# EAGLE board robopoly_shield (EAGLE 6.5.0)
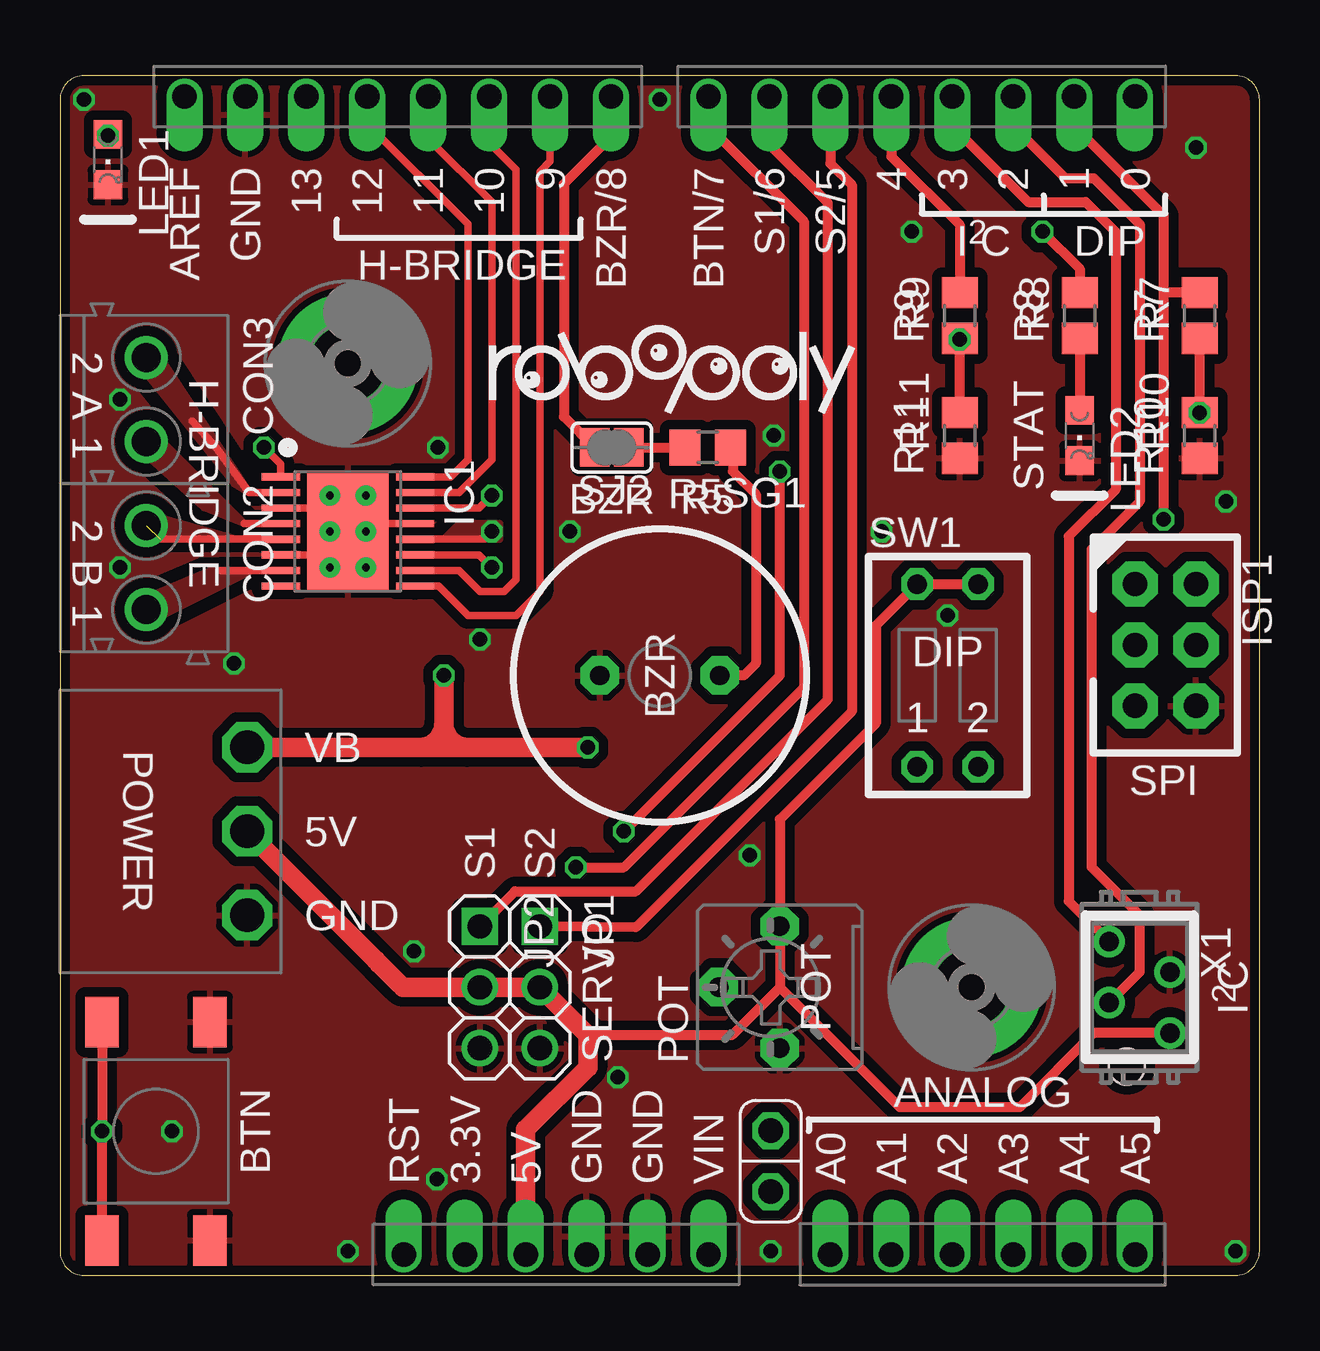
[diagram p0: board, top side]
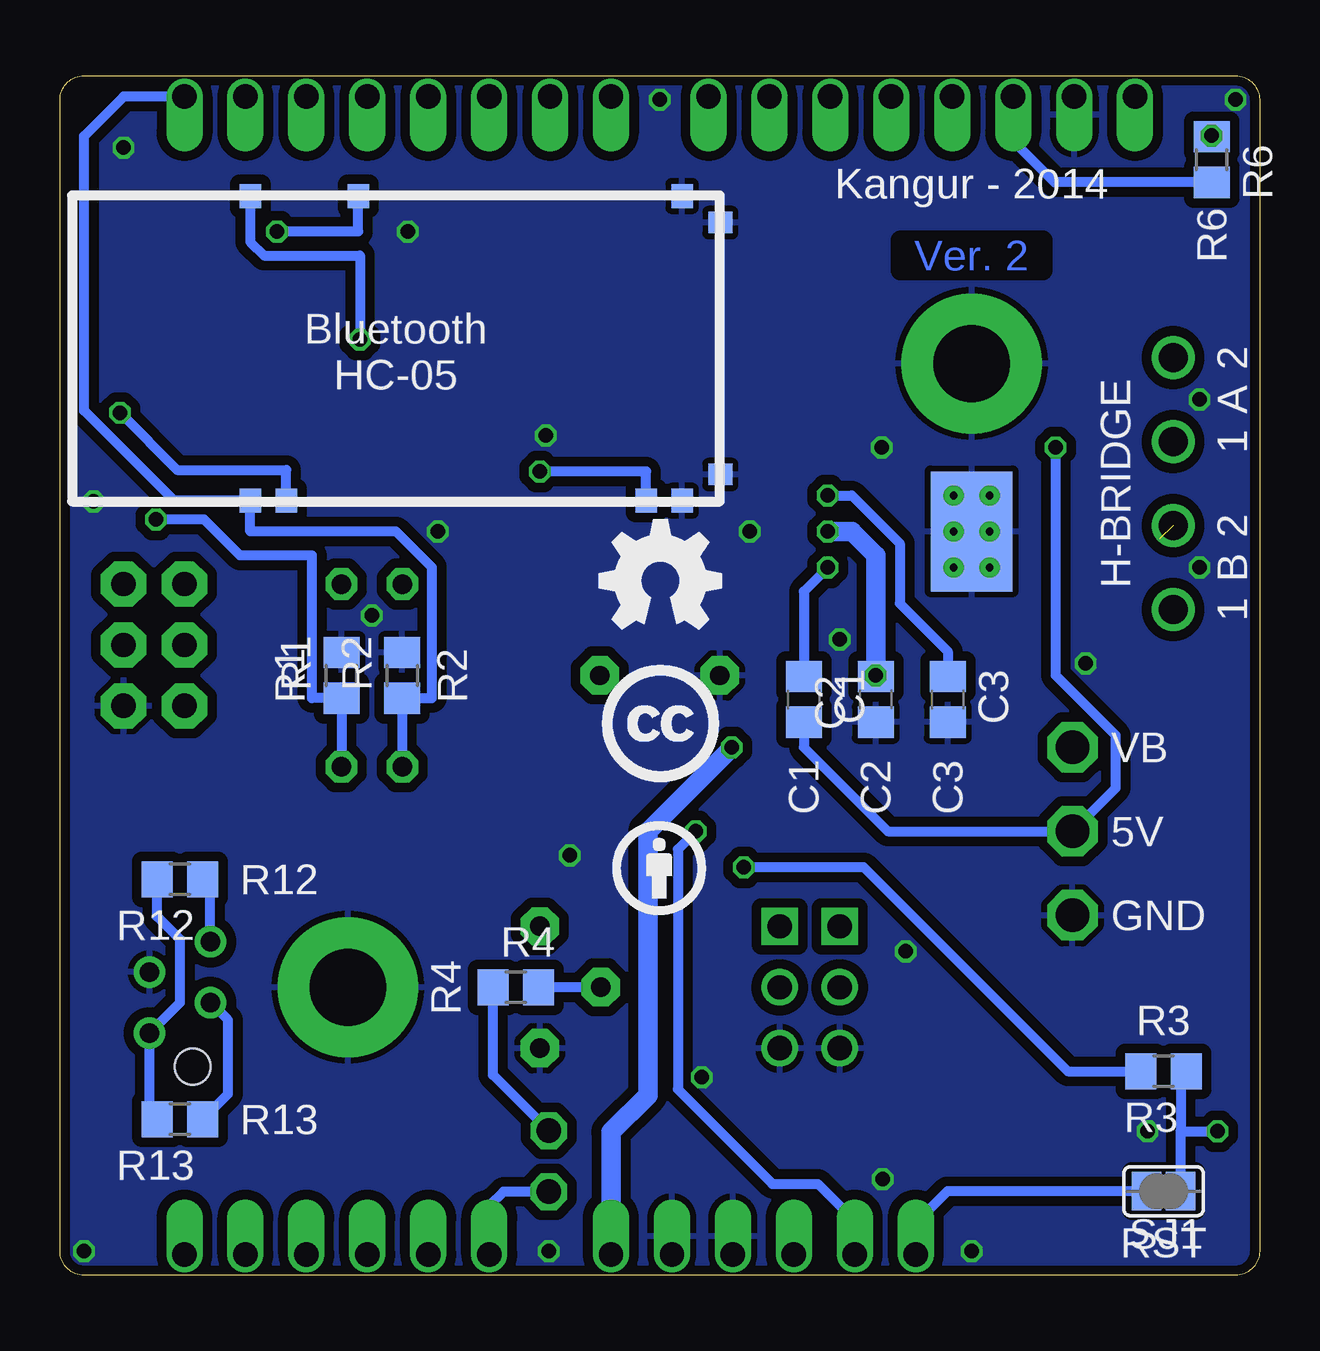
[diagram p1: board, bottom side, seen from below]

Size 50 x 50 mm. Coordinates in mm from the lower left corner, seen from the top.
Outline: 0,49 0,1 arc90 1,0 49,0 arc90 50,1 50,49 arc90 49,50 1,50 arc90 0,49
Copper layers (1*16): Top 0.035mm / dielectric 1.5mm / Bottom 0.035mm
Design rules "Fusion_eagle_rule_v1.1 *": minimum track width 6mil, minimum drill 12mil, track to track 6mil, track to pad 6mil, pad to pad 6mil, via to via 6mil, smd to smd 0mil, copper to edge 4mil, drill to drill 10mil, minimum pad ring 10mil, minimum via ring 6mil, stop-mask expansion 2mil, vias tented up to drill 100mil, thermal gap 10mil

## Footprints (pad centres in the part's own frame; a part is rotated, then mirrored left to right if it is on the bottom)
BUTTON = smd 1.4 x 2.1: 1 2.25,4.55; 2 2.25,-4.55; 3 -2.25,4.55; 4 -2.25,-4.55
C0805 = smd 1.3 x 1.5: 1 -0.95,0; 2 0.95,0
4UCON-19836 = drill 1.4 octagon: 1 -3.5,7.8; 2 0,7.8; 3 3.5,7.8
4UCON-19963 = drill 1.2: 1 -1.75,3.6; 2 1.75,3.6
3,2-PAD = drill 3.2 pad 5.842: B3,2 0,0
HTSSOP-16 = smd 0.3 x 1.6: 1 -2.275,-2.8; 2 -1.625,-2.8; 3 -0.975,-2.8; 4 -0.325,-2.8; 5 0.325,-2.8; 6 0.975,-2.8; 7 1.625,-2.8; 8 2.275,-2.8; 9 2.275,2.8; 10 1.625,2.8; 11 0.975,2.8; 12 0.325,2.8; 13 -0.325,2.8; 14 -0.975,2.8; 15 -1.625,2.8; 16 -2.275,2.8 | smd 5 x 3.4: PAD@1 0,0 | smd 5 x 3.4 bottom: PAD@2 0,0 | drill 0.33: PAD@3 -1.5,0.75; PAD@4 0,0.75; PAD@5 1.5,0.75; PAD@6 -1.5,-0.75; PAD@7 0,-0.75; PAD@8 1.5,-0.75
BLUETOOTH = smd 1 x 0.9: 1 -6.4,9.5; 2 -6.4,8; 12 -6.4,-7; 13 -6.4,-8.5; 22 6.3,-8.5; 31 6.3,5; 34 6.3,9.5 | smd 0.9 x 1: 14 -5.3,-10.1; 21 5.2,-10.1
2X3-NOSILK-STACK = drill 1.016 pad 1.88 octagon: 1 -2.54,-1.27; 2 -2.54,1.27; 3 0,-1.27; 4 0,1.27; 5 2.54,-1.27; 6 2.54,1.27
1X03 = drill 1.016 square: 1 -2.54,0 | drill 1.016: 2 0,0; 3 2.54,0
JUMPER = drill 1.02 octagon: A -1.27,0; B 1.27,0
CHIPLED_0805 = smd 1.2 x 1.2: A 0,-1.05; C 0,1.05
ARDUINO-LONG = drill 1.016 offset: 1 -10.668,-24.13; 2 -8.128,-24.13; 3 -5.588,-24.13; 4 -3.048,-24.13; 5 -0.508,-24.13; 6 2.032,-24.13; 7 7.112,-24.13; 8 9.652,-24.13; 9 12.192,-24.13; 10 14.732,-24.13; 11 17.272,-24.13; 12 19.812,-24.13; 13 19.812,24.13; 14 17.272,24.13; 15 14.732,24.13; 16 12.192,24.13; 17 9.652,24.13; 18 7.112,24.13; 19 4.572,24.13; 20 2.032,24.13; 21 -2.032,24.13; 22 -4.572,24.13; 23 -7.112,24.13; 24 -9.652,24.13; 25 -12.192,24.13; 26 -14.732,24.13; 27 -17.272,24.13; 28 -19.812,24.13
B25P = drill 0.813 pad 1.6 octagon: A -2.54,0; E 2.54,0; S 0,2.54
R0805 = smd 1.3 x 1.5: 1 -0.95,0; 2 0.95,0
PS1240P02BT = drill 0.8 pad 1.6 octagon: P$1 -2.5,0; P$2 2.5,0
SJ = smd 1.219 x 1.6: 1 -0.711,0; 2 0.711,0
EDG-02 = drill 0.813 octagon: 1 -1.27,-3.81; 2 1.27,-3.81; 3 1.27,3.81; 4 -1.27,3.81
MICROMATCH-4 = drill 0.813: 1 1.905,1.27; 2 0.635,-1.27; 3 -0.635,1.27; 4 -1.905,-1.27 | hole 1.5: 3.305,-0.53

## Placement (x,y rotation side)
BTN  BUTTON  [BUTTON]  4,6 0 top
BY1  BYBOTTOM  [BY]  25,17 0 top
C1  10nF, 16V min, X7R  [C0805]  19,24 270 bottom
C2  10uF  [C0805]  16,24 90 bottom
C3  2.2uF, 6.3V  [C0805]  13,24 270 bottom
CON1  4UCON-19836  [4UCON-19836]  0,18.5 270 top
CON2  4UCON-19963  [4UCON-19963]  0,29.5 270 top
CON3  4UCON-19963  [4UCON-19963]  0,36.5 270 top
H1  MOUNT-PAD-ROUND3.2  [3,2-PAD]  12,38 0 top
H2  MOUNT-PAD-ROUND3.2  [3,2-PAD]  38,12 0 top
IC1  DRV8833PWPR  [HTSSOP-16]  12,31 270 top
IC2  BLUETOOTH  [BLUETOOTH]  32.57,38.68 90 bottom
ISP1  ISP-6PIN  [2X3-NOSILK-STACK]  46.08,26.27 270 top
JP1  [1X03]  20,12 270 top
JP2  [1X03]  17.5,12 270 top
JP3  JUMPER  [JUMPER]  29.62,4.75 270 top
LED1  LED  [CHIPLED_0805]  2,46.5 180 top
LED2  STATUS  [CHIPLED_0805]  42.5,35 180 top
LICENCE1  LICENCECC-BOTTOM  [CREATIVE-COMMONS]  25,23 0 top
PIN1  ARDUINOSTACK  [ARDUINO-LONG]  25,25 0 top
POT  10K  [B25P]  30,12 90 top
R1  10K  [R0805]  38.27,25 90 bottom
R2  10K  [R0805]  35.73,25 90 bottom
R3  10K  [R0805]  4,8.5 180 bottom
R4  10K  [R0805]  31,12 0 bottom
R5  1K  [R0805]  27,34.5 180 top
R6  1K  [R0805]  2,46.5 270 bottom
R7  1K  [R0805]  47.5,40 90 top
R8  1K  [R0805]  42.5,40 90 top
R9  1K  [R0805]  37.5,40 90 top
R10  2K  [R0805]  47.5,35 90 top
R11  2K  [R0805]  37.5,35 90 top
R12  10K  [R0805]  45,16.5 180 bottom
R13  10K  [R0805]  45,6.5 180 bottom
SG1  BUZZER  [PS1240P02BT]  25,25 0 top
SJ1  [SJ]  4,3.5 180 bottom
SJ2  [SJ]  23,34.5 180 top
SW1  SW_DIP-2  [EDG-02]  37,25 0 top
U$9  ROBOPOLY-LOGOTOP-BIG  [ROBOPOLY-LOGO-TOP-BIG]  25,37.5 0 top
U$10  OPEN-HARDWARE-LOGOBOTTOM-SMALL  [OPEN-HARDWARE-BOTTOM-SMALL]  25,29 0 top
X1  MICROMATCH-4  [MICROMATCH-4]  45,12 270 top

## Library data of the parts
BTN BY1 CON1-CON3 H1 H2 IC1 IC2 ISP1 JP1-JP3 LICENCE1 PIN1 POT SJ1 SJ2 SW1 U$9 U$10 = robopoly
C1-C3 R1-R13 = rcl
LED1 LED2 = led
SG1 = robopoly; OC_FARNELL: unknown; OC_NEWARK: unknown
X1 = robopoly; MPN: 7-215464-4; OC_FARNELL: 3784629; OC_NEWARK: 19R8124

## Nets
3V3: IC2.12 PIN1.2
AIN1: IC1.15 PIN1.24
AIN2: IC1.16 PIN1.25
AOUT1: CON3.1 IC1.2
AOUT2: CON3.2 IC1.4
BIN1: IC1.9 PIN1.22
BIN2: IC1.10 PIN1.23
BOUT1: CON2.2 IC1.7
BOUT2: CON2.1 IC1.5
BTAT: PIN1.17 R9.2
BUTTON: PIN1.20 R3.2
BUZZER: PIN1.21 SJ2.2
GND: BTN.1 BTN.2 C2.1 C3.2 CON1.3 H1.B3,2 H2.B3,2 IC1.3 IC1.6 IC1.13 IC1.PAD@1 IC1.PAD@2 IC1.PAD@3 IC1.PAD@4 IC1.PAD@5 IC1.PAD@6 IC1.PAD@7 IC1.PAD@8 IC2.13 IC2.14 IC2.21 IC2.22 ISP1.6 JP1.3 JP2.3 LED1.C LED2.C PIN1.4 PIN1.5 PIN1.27 POT.A R1.2 R2.2 R10.1 R11.1 SG1.P$1 X1.3
LED: PIN1.26 R6.2
N$1: POT.S R4.2
N$2: IC2.31 R8.2
N$3: LED2.A R8.1
N$5: C3.1 IC1.14
N$6: C1.1 IC1.11
N$7: R5.1 SG1.P$2
N$8: IC2.34 R9.1 R11.2
N$9: R5.2 SJ2.1
N$12: JP3.A R4.1
N$13: LED1.A R6.1
N$18: BTN.3 BTN.4 R3.1 SJ1.1
N$27: IC2.2 R7.1 R10.2
POT: JP3.B PIN1.7
RESET: PIN1.1 SJ1.2
RX: PIN1.14 R1.1 R7.2 SW1.2
SCL: PIN1.16 R12.1 X1.4
SDA: PIN1.15 R13.1 X1.2
SERVO1: JP1.1 PIN1.18
SERVO2: JP2.1 PIN1.19
TX: IC2.1 PIN1.13 R2.1 SW1.1
VCC: C1.2 CON1.2 IC1.1 JP1.2 JP2.2 PIN1.3 POT.E R12.2 R13.2 SW1.3 SW1.4 X1.1
VM: C2.2 CON1.1 IC1.12 PIN1.6

## Tracks (layer width: path | path; a pad name or v marks a point on that pad's centre or on a via)
3V3  (via drill 0.6)
  Top 0.406: v23.5,18.5 30,25 v30,33.5
  Bottom 0.406: IC2.12 25.57,33.5 v30,33.5 | v23.5,18.5 24.25,17.75 24.25,7.75 20.31,3.81 18.41,3.81 16.87,2.27 PIN1.2
AIN1
  Top 0.305: IC1.15 16.62,32.62 18,34 18,44.73 15.35,47.38 PIN1.24
AIN2
  Top 0.305: IC1.16 16.27,33.27 17,34 17,43.81 12.81,48.01 PIN1.25
AOUT1
  Top 0.305: IC1.2 7.88,32.62 6.5,34.5 5.5,35.6
  pour Top (no thermals): 7.88,32.62 7.25,33 3.25,38 4,38.5
AOUT2
  Top 0.305: IC1.4 7.67,31.32
  pour Top (no thermals): 7.67,31.32 6,32 3.25,34.5 4,35
BIN1
  Top 0.305: IC1.9 15.78,28.73 17,27.5 19,27.5 20,28.5 20,46 20.43,46.43 PIN1.22
BIN2
  Top 0.305: IC1.10 16.62,29.38 17.5,28.5 18.5,28.5 19,29 19,46.09 17.89,47.2 PIN1.23
BOUT1
  Top 0.305: IC1.7 6.72,29.38
  pour Top (no thermals): 8,29.38 6.25,29.38 3,28 3.75,27.25
BOUT2  (1 unrouted)
  Top 0.305: IC1.5 4.17,30.68
  pour Top (no thermals): 7.33,30.68 3.5,31.75 3.25,30.75 5.33,30.68
BTAT
  Top 0.406: PIN1.17 34.65,46.63 37.5,43.78 R9.2
BUTTON  (via drill 0.6)
  Top 0.406: v21.5,17 23.5,17 31,24.5 31,43.93 27.03,47.9 PIN1.20
  Bottom 0.406: R3.2 8,8.5 16.5,17 v21.5,17
BUZZER
  Top 0.406: PIN1.21 22.97,47.46 21,45.49 21,35.79 SJ2.2
GND  (via drill 0.6)
  Top 0.305: IC1.3 10.72,31.98 | IC1.6 10.72,30.02 | IC1.13 13.07,31.32
  Top 0.406: 10.72,31.98 10.88,32.12 | 10.88,32.12 IC1.PAD@6 IC1.PAD@3 | 10.88,32.12 11.25,31.75 IC1.PAD@7 10.72,30.48 10.72,30.02 IC1.PAD@8 IC1.PAD@5 | 13.07,31.32 IC1.PAD@4
  other vias: 29.62,1 25,49 47.35,47 49,1 1,49 17.5,26.5 4.66,6 7.25,25.5 2.5,29.5 2.5,36.5 15.75,34.5 23.25,8.25 35.5,43.5 29.75,35 21.25,31 15.71,4 12,1 14.75,13.5 28.75,17.5 34.25,31 37,27.5 48.6,32.25
  pour Top (isolate 0.406, rank 2): 49,0 1,0 arc-90 0,1 0,49 arc-90 1,50 49,50 arc-90 50,49 50,1 arc-90
  pour Bottom (isolate 0.406, rank 2): 49,0 1,0 arc-90 0,1 0,49 arc-90 1,50 49,50 arc-90 50,49 50,1 arc-90
LED
  Bottom 0.406: R6.2 8.55,45.55 10.27,47.27 PIN1.26
N$1
  Bottom 0.406: POT.S R4.2
N$2  (via drill 0.6)
  Top 0.406: v40.95,43.5 42.5,41.95 R8.2
  Bottom 0.406: v40.95,43.5 37.57,43.5 IC2.31
N$3
  Top 0.406: R8.1 LED2.A
N$4
  Top 0.406: 22.5,34.5 23.5,34.5
N$5  (via drill 0.6)
  Top 0.305: IC1.14 17.48,31.98 v18,32.5
  Bottom 0.406: v18,32.5 17,32.5 15,30.5 15,28 13,26 C3.1
N$6  (via drill 0.6)
  Top 0.305: IC1.11 17.48,30.02 v18,29.5
  Bottom 0.406: v18,29.5 19,28.5 C1.1
N$7
  Top 0.406: SG1.P$2 28.5,25 29,25.5 29,32.55 28.05,33.5 28.05,34.5 R5.1
N$8  (via drill 0.6)
  Top 0.406: R11.2 v37.5,39 R9.1
  Bottom 0.406: IC2.34 42.07,43.07 41.5,42.5 37.5,42.5 v37.5,39
N$9
  Top 0.406: SJ2.1 R5.2
N$12
  Bottom 0.406: JP3.A 31.95,8.35 R4.1
N$13  (via drill 0.6)
  Top 0.406: v2,47.5 LED1.A
  Bottom 0.406: R6.1 v2,47.5
N$18  (via drill 0.6)
  Top 0.406: BTN.4 v1.75,6 BTN.3
  Bottom 0.406: SJ1.1 3.29,6 | 3.29,6 v1.75,6 | R3.1 3.29,8.26 3.29,6
N$27  (via drill 0.6)
  Top 0.406: R10.2 R7.1
  Bottom 0.406: IC2.2 40.57,33.57 45.12,33.57 R10.2
  other vias: 47.5,35.95
POT
  Bottom 0.406: JP3.B 31.52,3.48 32.11,2.89 PIN1.7
RESET
  Bottom 0.406: PIN1.1 14.33,2.18 13.01,3.5 SJ1.2
RX  (via drill 0.6)
  Top 0.406: v46,31.5 46,40.95 | R7.2 46,40.95 | 46,40.95 46,44.17 42.27,47.9 PIN1.14
  Bottom 0.406: SW1.2 R1.1 39.5,24.05 39.5,30 42.5,30 44,31.5 v46,31.5
SCL
  Top 0.406: PIN1.16 37.19,47.9 40.36,44.73 42.75,44.73 44,43.48 44,32.75 42.05,30.8 42.05,15.59 X1.4
  Bottom 0.406: X1.4 43.73,16.18 R12.1
SDA
  Top 0.406: PIN1.15 39.73,47.9 41.91,45.72 43.09,45.72 45,43.81 45,32.25 43,30.25 43,17 45,15 45,12.63 X1.2
  Bottom 0.406: R13.1 43,7.55 43,10.63 X1.2
SERVO1
  Top 0.406: JP1.1 24,14.5 33,23.5 33,45.45 32.11,46.34 PIN1.18
SERVO2
  Top 0.406: JP2.1 18.96,16 24,16 32,24 32,44.7 29.57,47.13 PIN1.19
TX
  Bottom 0.406: PIN1.13 47.35,49.13 49,47.48 49,36.03 45.25,32.28 IC2.1 42.07,31 36,31 34.5,29.5 34.5,24.05 R2.1 SW1.1
VCC  (via drill 0.6)
  Top 0.305: IC1.1 9.2,33.8 v8.5,34.5
  Top 0.406: 30,12 35,7 40,7 43.09,10.1 X1.1 | 30,12 POT.E 30,19 34,23 34,27.08 SW1.4 SW1.3 | 30,12 28,10 22,10 | 14.3,12 14,12 13.15,12.85 13.15,13.15
  Top 0.813: CON1.2 13.15,13.15 14.3,12 JP1.2 | JP2.2 JP1.2 | JP1.2 22,10 22,8.66 19.41,6.08 PIN1.3
  Bottom 0.406: v8.5,34.5 8.5,25 6,22.5 6,20.3 CON1.2 15.5,18.5 19,22 C1.2 | R13.2 46.27,6.82 X1.1 45,11.37 45,14 45.95,14.95 R12.2
VM  (via drill 0.6)
  Top 0.305: IC1.12 17.68,30.68 v18,31
  Top 0.813: v22,22 17,22 | 17,22 16,22 | 16,22 15,22 | 15,22 CON1.1 | v16,25 16,23 | 16,23 16,22 | 15,22 arc90 16,23 | 16,23 arc90 17,22
  Bottom 0.406: C2.2 v16,25
  Bottom 0.813: v18,31 17,31 16,30 v16,25 | v22,22 25.5,18.5 25.5,7.5 27.03,5.97 PIN1.6
  pour Top (no thermals): 16,30.68 16.65,31.32 18.32,31.32 18.32,30.68

## Text on the board
Bottom: Ver. 2
tPlace: AREF | GND | 13 | 12 | 11 | 10 | 9 | BZR/8 | BTN/7 | S1/6 | S2/5 | 4 | 3 | 2 | 1 | 0 | 2 | I C | DIP | H-BRIDGE | R9 | R8 | R7 | 2 | A | R11 | STAT | R10 | 1 | H-BRIDGE | BZR | R5 | 2 | B | 1 | DIP | BZR | 1 | 2 | VB | SPI | POWER | 5V | S1 | S2 | GND | SERVO | POT | 2 | I C | ANALOG | BTN | RST | 3.3V | 5V | GND | GND | VIN | A0 | A1 | A2 | A3 | A4 | A5
bPlace: Kangur - 2014 | R6 | 2 | Bluetooth / HC-05 | A | 1 | H-BRIDGE | 2 | B | 1 | R2 | R1 | VB | C3 | C2 | C1 | 5V | R12 | GND | R4 | R3 | R13 | RST
Document: Robopoly Shield | Version: 2 | http://robopoly.epfl.ch | 2014-07-25 | Licence: CC-BY